# EAGLE board l1b_mk2 (EAGLE 6.4)
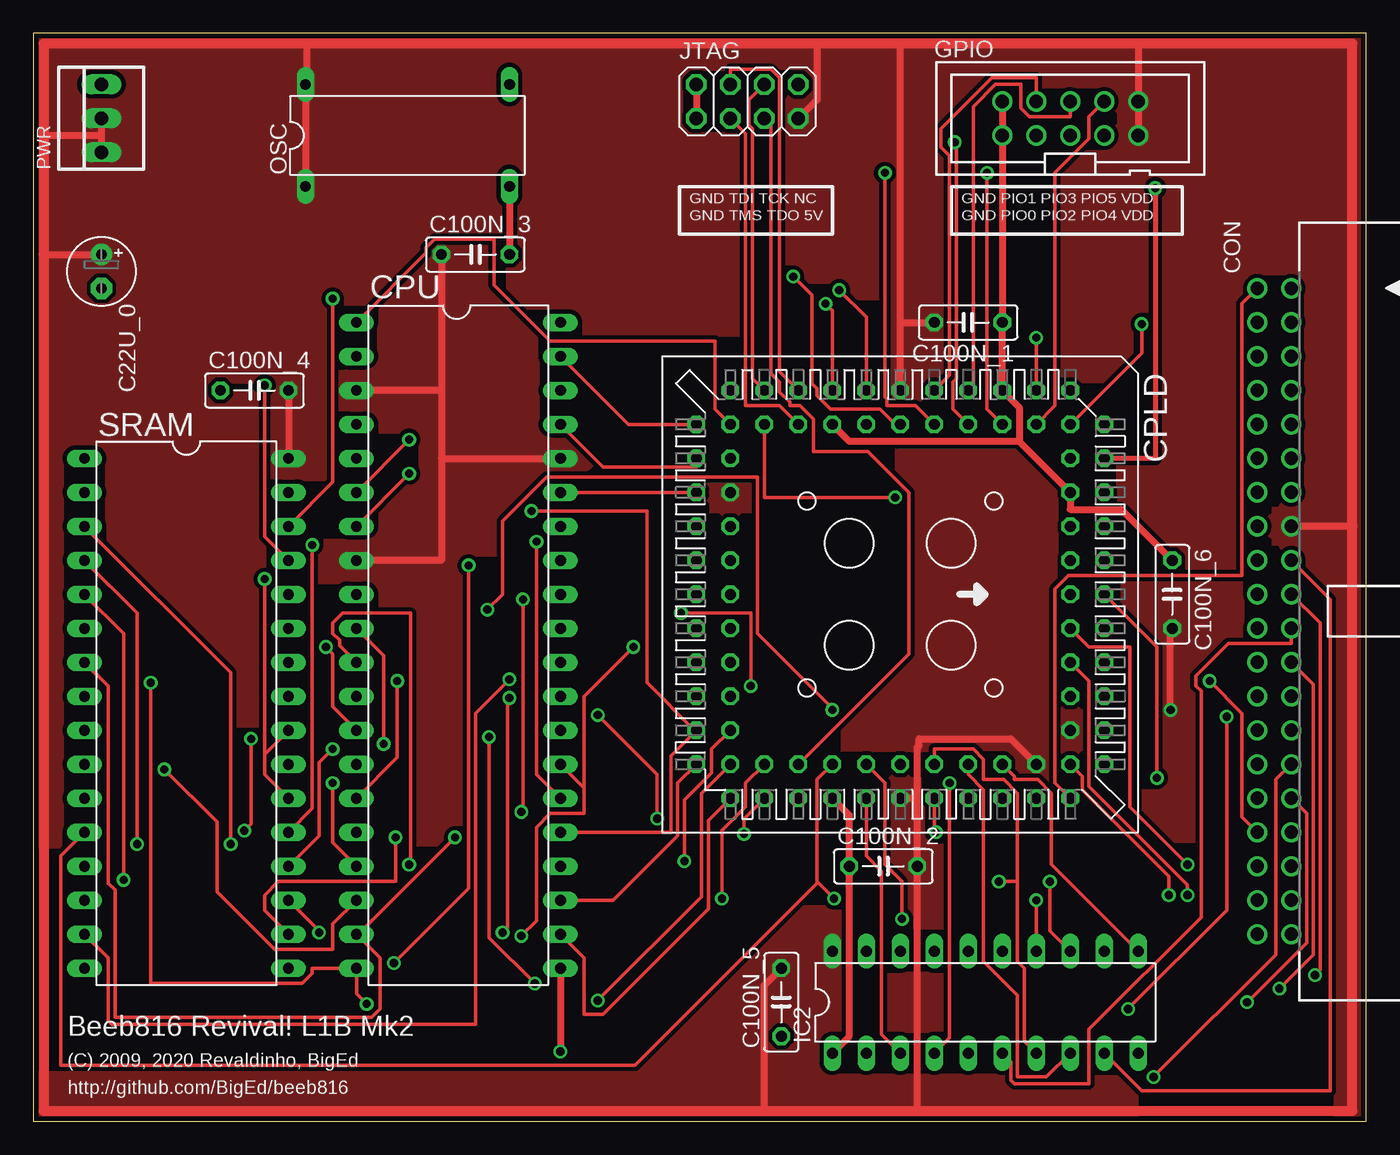
[diagram p0: board, top side]
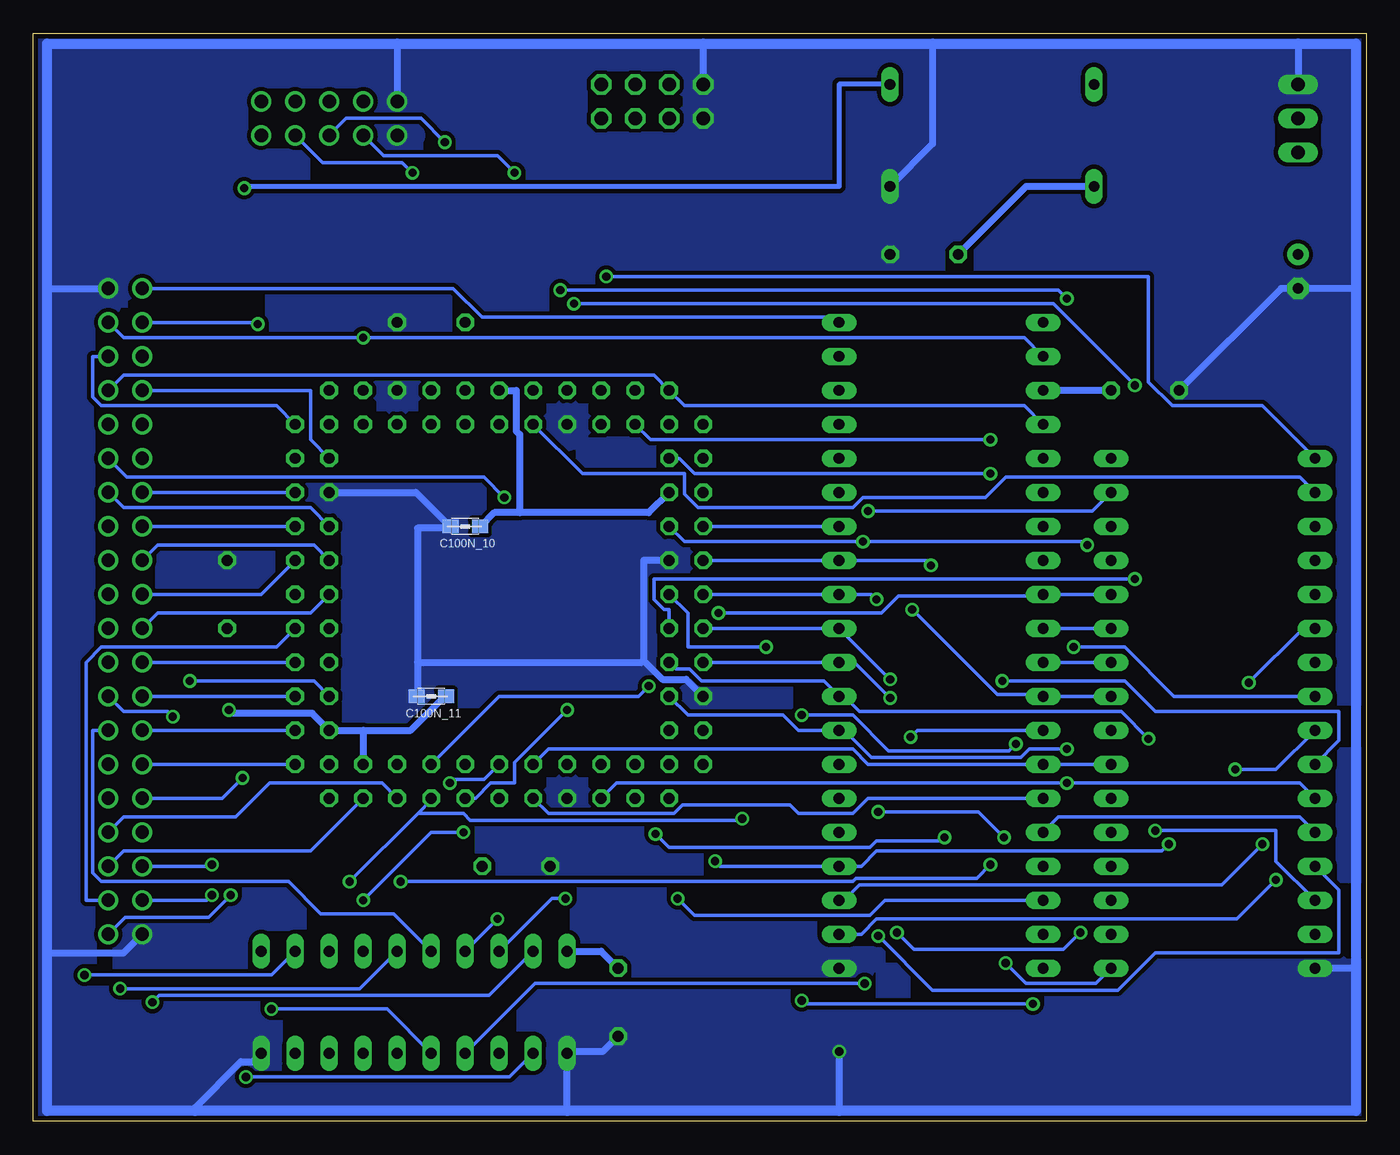
[diagram p1: board, bottom side, seen from below]

Size 99.57 x 81.28 mm. Coordinates in mm from the lower left corner, seen from the top.
Outline: 0,0 99.57,0 99.57,81.28 0,81.28 0,0
Copper layers (1*16): Top 0.035mm / dielectric 1.5mm / Bottom 0.035mm
Design rules "design_rules": minimum track width 10mil, minimum drill 24mil, track to track 10mil, track to pad 10mil, pad to pad 12mil, via to via 15mil, smd to smd 8mil, copper to edge 15mil, drill to drill 8mil, minimum pad ring 10mil, minimum via ring 8mil, stop-mask expansion 4mil, vias tented up to drill 0mil, thermal gap 10mil
Net classes: 0 signal: width 0.254 mm, clearance 0.254 mm; 1 supply: width 0.508 mm, clearance 0.305 mm

## Footprints (pad centres in the part's own frame; a part is rotated, then mirrored left to right if it is on the bottom)
E2,5-5 = drill 0.813 pad 1.6: + -1.27,0 | drill 0.813 pad 1.6 octagon: - 1.27,0
C050-025X075 = drill 0.813 octagon: 1 -2.54,0; 2 2.54,0
0805 = smd 1.2 x 1: 1 -1.1,0; 2 1.1,0
PAK100/2500-5-40 = drill 1 pad 1.422: 1 -24.13,-1.27; 2 -24.13,1.27; 3 -21.59,-1.27; 4 -21.59,1.27; 5 -19.05,-1.27; 6 -19.05,1.27; 7 -16.51,-1.27; 8 -16.51,1.27; 9 -13.97,-1.27; 10 -13.97,1.27; 11 -11.43,-1.27; 12 -11.43,1.27; 13 -8.89,-1.27; 14 -8.89,1.27; 15 -6.35,-1.27; 16 -6.35,1.27; 17 -3.81,-1.27; 18 -3.81,1.27; 19 -1.27,-1.27; 20 -1.27,1.27; 21 1.27,-1.27; 22 1.27,1.27; 23 3.81,-1.27; 24 3.81,1.27; 25 6.35,-1.27; 26 6.35,1.27; 27 8.89,-1.27; 28 8.89,1.27; 29 11.43,-1.27; 30 11.43,1.27; 31 13.97,-1.27; 32 13.97,1.27; 33 16.51,-1.27; 34 16.51,1.27; 35 19.05,-1.27; 36 19.05,1.27; 37 21.59,-1.27; 38 21.59,1.27; 39 24.13,-1.27; 40 24.13,1.27
PLCC-S84-SOCKET = drill 0.813 octagon: 1 0,15.24; 2 0,12.7; 3 -2.54,15.24; 4 -2.54,12.7; 5 -5.08,15.24; 6 -5.08,12.7; 7 -7.62,15.24; 8 -7.62,12.7; 9 -10.16,15.24; 10 -10.16,12.7; 11 -12.7,15.24; 12 -15.24,12.7; 13 -12.7,12.7; 14 -15.24,10.16; 15 -12.7,10.16; 16 -15.24,7.62; 17 -12.7,7.62; 18 -15.24,5.08; 19 -12.7,5.08; 20 -15.24,2.54; 21 -12.7,2.54; 22 -15.24,0; 23 -12.7,0; 24 -15.24,-2.54; 25 -12.7,-2.54; 26 -15.24,-5.08; 27 -12.7,-5.08; 28 -15.24,-7.62; 29 -12.7,-7.62; 30 -15.24,-10.16; 31 -12.7,-10.16; 32 -15.24,-12.7; 33 -12.7,-15.24; 34 -12.7,-12.7; 35 -10.16,-15.24; 36 -10.16,-12.7; 37 -7.62,-15.24; 38 -7.62,-12.7; 39 -5.08,-15.24; 40 -5.08,-12.7; 41 -2.54,-15.24; 42 -2.54,-12.7; 43 0,-15.24; 44 0,-12.7; 45 2.54,-15.24; 46 2.54,-12.7; 47 5.08,-15.24; 48 5.08,-12.7; 49 7.62,-15.24; 50 7.62,-12.7; 51 10.16,-15.24; 52 10.16,-12.7; 53 12.7,-15.24; 54 15.24,-12.7; 55 12.7,-12.7; 56 15.24,-10.16; 57 12.7,-10.16; 58 15.24,-7.62; 59 12.7,-7.62; 60 15.24,-5.08; 61 12.7,-5.08; 62 15.24,-2.54; 63 12.7,-2.54; 64 15.24,0; 65 12.7,0; 66 15.24,2.54; 67 12.7,2.54; 68 15.24,5.08; 69 12.7,5.08; 70 15.24,7.62; 71 12.7,7.62; 72 15.24,10.16; 73 12.7,10.16; 74 15.24,12.7; 75 12.7,15.24; 76 12.7,12.7; 77 10.16,15.24; 78 10.16,12.7; 79 7.62,15.24; 80 7.62,12.7; 81 5.08,15.24; 82 5.08,12.7; 83 2.54,15.24; 84 2.54,12.7
DIL40 = drill 0.813 long: 1 -24.13,-7.62; 2 -21.59,-7.62; 3 -19.05,-7.62; 4 -16.51,-7.62; 5 -13.97,-7.62; 6 -11.43,-7.62; 7 -8.89,-7.62; 8 -6.35,-7.62; 9 -3.81,-7.62; 10 -1.27,-7.62; 11 1.27,-7.62; 12 3.81,-7.62; 13 6.35,-7.62; 14 8.89,-7.62; 15 11.43,-7.62; 16 13.97,-7.62; 17 16.51,-7.62; 18 19.05,-7.62; 19 21.59,-7.62; 20 24.13,-7.62; 21 24.13,7.62; 22 21.59,7.62; 23 19.05,7.62; 24 16.51,7.62; 25 13.97,7.62; 26 11.43,7.62; 27 8.89,7.62; 28 6.35,7.62; 29 3.81,7.62; 30 1.27,7.62; 31 -1.27,7.62; 32 -3.81,7.62; 33 -6.35,7.62; 34 -8.89,7.62; 35 -11.43,7.62; 36 -13.97,7.62; 37 -16.51,7.62; 38 -19.05,7.62; 39 -21.59,7.62; 40 -24.13,7.62
PAK100/2500-10 = drill 1 pad 1.422: 1 -5.08,-1.27; 2 -5.08,1.27; 3 -2.54,-1.27; 4 -2.54,1.27; 5 0,-1.27; 6 0,1.27; 7 2.54,-1.27; 8 2.54,1.27; 9 5.08,-1.27; 10 5.08,1.27
DIL20 = drill 0.813 long: 1 -11.43,-3.81; 2 -8.89,-3.81; 3 -6.35,-3.81; 4 -3.81,-3.81; 5 -1.27,-3.81; 6 1.27,-3.81; 7 3.81,-3.81; 8 6.35,-3.81; 9 8.89,-3.81; 10 11.43,-3.81; 11 11.43,3.81; 12 8.89,3.81; 13 6.35,3.81; 14 3.81,3.81; 15 1.27,3.81; 16 -1.27,3.81; 17 -3.81,3.81; 18 -6.35,3.81; 19 -8.89,3.81; 20 -11.43,3.81
2X04 = drill 1.016 octagon: 1 -3.81,-1.27; 2 -3.81,1.27; 3 -1.27,-1.27; 4 -1.27,1.27; 5 1.27,-1.27; 6 1.27,1.27; 7 3.81,-1.27; 8 3.81,1.27
DIL14/4 = drill 0.813 long: 1 -7.62,-3.81; 7 7.62,-3.81; 8 7.62,3.81; 14 -7.62,3.81
22-23-2031 = drill 1 long: 1 -2.54,0; 2 0,0; 3 2.54,0
DIL32 = drill 0.813 long: 1 -19.05,-7.62; 2 -16.51,-7.62; 3 -13.97,-7.62; 4 -11.43,-7.62; 5 -8.89,-7.62; 6 -6.35,-7.62; 7 -3.81,-7.62; 8 -1.27,-7.62; 9 1.27,-7.62; 10 3.81,-7.62; 11 6.35,-7.62; 12 8.89,-7.62; 13 11.43,-7.62; 14 13.97,-7.62; 15 16.51,-7.62; 16 19.05,-7.62; 17 19.05,7.62; 18 16.51,7.62; 19 13.97,7.62; 20 11.43,7.62; 21 8.89,7.62; 22 6.35,7.62; 23 3.81,7.62; 24 1.27,7.62; 25 -1.27,7.62; 26 -3.81,7.62; 27 -6.35,7.62; 28 -8.89,7.62; 29 -11.43,7.62; 30 -13.97,7.62; 31 -16.51,7.62; 32 -19.05,7.62

## Placement (x,y rotation side)
C22U_0  [E2,5-5]  5.08,63.5 270 top
C100N_1  [C050-025X075]  69.85,59.69 180 top
C100N_2  [C050-025X075]  63.5,19.05 0 top
C100N_3  [C050-025X075]  33.02,64.77 0 top
C100N_4  [C050-025X075]  16.51,54.61 0 top
C100N_5  [C050-025X075]  55.88,8.89 90 top
C100N_6  [C050-025X075]  85.09,39.37 270 top
C100N_10  [0805]  67.31,44.45 0 bottom
C100N_11  [0805]  69.85,31.75 0 bottom
CON  [PAK100/2500-5-40]  92.71,38.1 270 top
CPLD  [PLCC-S84-SOCKET]  64.77,39.37 270 top
CPU  [DIL40]  31.75,35.56 270 top
GPIO  [PAK100/2500-10]  77.47,74.93 0 top
IC2  [DIL20]  71.12,8.89 0 top
JTAG  [2X04]  53.34,76.2 0 top
OSC  [DIL14/4]  27.94,73.66 0 top
PWR  [22-23-2031]  5.08,74.93 90 top
SRAM  [DIL32]  11.43,30.48 270 top

## Library data of the parts
C22U_0 C100N_1-C100N_6 = resistor
C100N_10 C100N_11 = wuerth-elektronik
CON GPIO = con-3m
CPLD CPU IC2 OSC SRAM = ic-package
JTAG = pinhead
PWR = con-molex

## Nets
BBC_A0: CON.18 IC2.9
BBC_A1: CON.20 IC2.12
BBC_A2: CON.22 IC2.6
BBC_A3: CON.24 IC2.15
BBC_A4: CON.26 IC2.5
BBC_A5: CON.28 IC2.16
BBC_A6: CON.30 IC2.2
BBC_A7: CON.32 IC2.19
BBC_A8: CON.34 CPLD.70
BBC_A9: CON.36 CPLD.72
BBC_A10: CON.38 CPLD.83
BBC_A11: CON.40 CPLD.76
BBC_A12: CON.37 CPLD.82
BBC_A13: CON.35 CPLD.84
BBC_A14: CON.33 CPLD.80
BBC_A15: CON.31 CPLD.1
BBC_D0: CON.15 CPLD.5
BBC_D1: CON.17 CPLD.4
BBC_D2: CON.19 CPLD.3
BBC_D3: CON.21 CPLD.2
BBC_D4: CON.23 CPLD.81
BBC_D5: CON.25 CPLD.79
BBC_D6: CON.27 CPLD.77
BBC_D7: CON.29 CPLD.75
BBC_PHI0: CON.7 CPLD.10
BBC_PHI1: CON.6 CPLD.11
BBC_PHI2: CON.3 CPLD.13
BBC_RNW: CON.13 CPLD.7
BBC_SYNC: CON.14 CPLD.6
CPU_A0: CPLD.69 CPU.9 IC2.8 SRAM.28
CPU_A1: CPLD.68 CPU.10 IC2.13 SRAM.27
CPU_A2: CPLD.67 CPU.11 IC2.7 SRAM.26
CPU_A3: CPLD.66 CPU.12 IC2.14 SRAM.25
CPU_A4: CPLD.65 CPU.13 IC2.4 SRAM.8
CPU_A5: CPLD.63 CPU.14 IC2.17 SRAM.23
CPU_A6: CPLD.62 CPU.15 IC2.3 SRAM.10
CPU_A7: CPLD.61 CPU.16 IC2.18 SRAM.12
CPU_A8: CPLD.58 CPU.17 SRAM.11
CPU_A9: CPLD.57 CPU.18 SRAM.9
CPU_A10: CPLD.56 CPU.19 SRAM.7
CPU_A11: CPLD.55 CPU.20 SRAM.6
CPU_A12: CPLD.54 CPU.22 SRAM.5
CPU_A13: CPLD.53 CPU.23 SRAM.4
CPU_A14: CPLD.52 CPU.24 SRAM.3
CPU_A15: CPLD.51 CPU.25 SRAM.31
CPU_D0: CPLD.41 CPU.33 SRAM.17
CPU_D1: CPLD.43 CPU.32 SRAM.18
CPU_D2: CPLD.45 CPU.31 SRAM.15
CPU_D3: CPLD.47 CPU.30 SRAM.19
CPU_D4: CPLD.48 CPU.29 SRAM.14
CPU_D5: CPLD.50 CPU.28 SRAM.20
CPU_D6: CPLD.44 CPU.27 SRAM.13
CPU_D7: CPLD.40 CPU.26 SRAM.21
CPU_E: CPLD.37 CPU.35
CPU_PHI2: CPLD.35 CPU.37
CPU_RNW: CPLD.39 CPU.34
CPU_VDA: CPLD.33 CPU.39
CPU_VPA: CPLD.36 CPU.7
CPU_VPB: CPLD.34 CPU.1
GPIO0: CPLD.21 GPIO.3
GPIO1: CPLD.20 GPIO.4
GPIO2: CPLD.19 GPIO.5
GPIO3: CPLD.18 GPIO.6
GPIO4: CPLD.17 GPIO.7
GPIO5: CPLD.15 GPIO.8
HSCLK: CPLD.9 OSC.8
IRQB: CON.8 CPLD.32 CPU.4
LAT_EN: CPLD.71 IC2.11
NMIB: CON.12 CPLD.31 CPU.6
RAM_A16: CPLD.25 SRAM.2
RAM_A17: CPLD.24 SRAM.30
RAM_A18: CPLD.23 SRAM.1
RAM_CEB: CPLD.46 SRAM.22 SRAM.24
RAM_WEB: CPLD.26 SRAM.29
RDY: CON.4 CPLD.14 CPU.2
RESETB: CON.1 CPLD.74 CPU.40
TCK: CPLD.30 JTAG.6
TDI: CPLD.28 JTAG.4
TDO: CPLD.59 JTAG.5
TMS: CPLD.29 JTAG.3
VDD [supply]: C22U_0.+ C100N_1.2 C100N_2.2 C100N_3.1 C100N_4.2 C100N_5.2 C100N_6.2 C100N_10.2 C100N_11.2 CON.16 CPLD.22 CPLD.38 CPLD.64 CPLD.73 CPLD.78 CPU.3 CPU.8 CPU.36 GPIO.9 GPIO.10 IC2.20 JTAG.7 OSC.1 OSC.14 PWR.1 PWR.2 SRAM.32
VSS [supply]: C22U_0.- C100N_1.1 C100N_2.1 C100N_3.2 C100N_4.1 C100N_5.1 C100N_6.1 C100N_10.1 C100N_11.1 CON.2 CON.39 CPLD.8 CPLD.16 CPLD.27 CPLD.42 CPLD.49 CPLD.60 CPU.21 GPIO.1 GPIO.2 IC2.1 IC2.10 JTAG.1 JTAG.2 OSC.7 PWR.3 SRAM.16

## Tracks (layer width: path | path; a pad name or v marks a point on that pad's centre or on a via)
BBC_A0
  Top 0.254: IC2.9 82.8,2.29 96.9,2.29 96.9,38.99 CON.18
BBC_A1  (via drill 0.61)
  Top 0.254: v95.76,10.92 96.14,11.3 96.14,37.21 CON.20
  Bottom 0.254: IC2.12 81.79,10.92 v95.76,10.92
BBC_A2
  Top 0.254: IC2.6 73.03,4.45 73.03,3.05 73.28,2.79 78.87,2.79 78.87,6.86 87.25,15.24 87.25,32.13 86.87,32.51 86.87,33.27 89.28,35.69 93.98,35.69 CON.22
BBC_A3  (via drill 0.61)
  Top 0.254: v93.09,9.91 95.63,12.45 95.63,32.64 CON.24
  Bottom 0.254: IC2.15 75.18,9.91 v93.09,9.91
BBC_A4  (via drill 0.61)
  Top 0.254: v81.79,8.38 89.15,15.75 v89.15,30.23
  Bottom 0.254: IC2.5 73.15,8.38 v81.79,8.38 | v89.15,30.23 89.53,30.61 92.84,30.61 CON.26
BBC_A5
  Bottom 0.254: IC2.16 72.64,15.49 78.11,15.49 80.52,17.91 94.49,17.91 95.12,18.54 95.12,29.21 CON.28
BBC_A6  (via drill 0.61)
  Top 0.254: v83.69,3.3 92.84,12.45 92.84,25.53 CON.30
  Bottom 0.254: IC2.2 64.01,3.3 v83.69,3.3
BBC_A7  (via drill 0.61)
  Top 0.254: v90.68,8.89 95.12,13.34 95.12,22.99 CON.32
  Bottom 0.254: IC2.19 65.53,9.4 90.17,9.4 v90.68,8.89
BBC_A8
  Bottom 0.254: CPLD.70 73.53,25.27 81.92,25.27 84.45,22.73 92.84,22.73 CON.34
BBC_A9
  Bottom 0.254: CPLD.72 78.87,20.19 92.84,20.19 CON.36
BBC_A10
  Bottom 0.254: CPLD.83 81.41,35.43 94.49,35.43 95.63,34.29 95.63,16.51 CON.38
BBC_A11  (via drill 0.61)
  Top 0.254: CPLD.76 78.36,25.78 78.36,24.77 84.84,18.29 v84.84,16.89
  Bottom 0.254: v84.84,16.89 86.49,15.24 92.71,15.24 CON.40
BBC_A12  (via drill 0.61)
  Top 0.254: CPLD.82 78.87,32.89 78.87,25.02 86.23,17.65 v86.23,16.89
  Bottom 0.254: v86.23,16.89 86.61,16.51 CON.37
BBC_A13  (via drill 0.61)
  Top 0.254: CPLD.84 78.87,35.43 81.92,35.43 81.92,23.5 v86.23,19.18
  Bottom 0.254: v86.23,19.18 86.36,19.05 CON.35
BBC_A14  (via drill 0.61)
  Top 0.254: v87.88,32.89 90.3,30.48 90.3,22.73 CON.33
  Bottom 0.254: CPLD.80 78.61,32.89 v87.88,32.89
BBC_A15  (via drill 0.61)
  Top 0.254: CPLD.1 83.95,35.43 v83.95,25.65
  Bottom 0.254: v83.95,25.65 85.47,24.13 CON.31
BBC_D0
  Bottom 0.254: CON.15 CPLD.5
BBC_D1
  Bottom 0.254: CPLD.4 78.61,43.05 90.3,43.05 CON.17
BBC_D2
  Bottom 0.254: CPLD.3 82.55,39.37 CON.19
BBC_D3
  Bottom 0.254: CPLD.2 78.87,37.97 90.3,37.97 CON.21
BBC_D4
  Bottom 0.254: CON.23 CPLD.81
BBC_D5
  Bottom 0.254: CON.25 CPLD.79
BBC_D6
  Bottom 0.254: CON.27 CPLD.77
BBC_D7
  Bottom 0.254: CON.29 CPLD.75
BBC_PHI0
  Bottom 0.254: CPLD.10 78.87,50.93 78.87,54.61 CON.7
BBC_PHI1
  Bottom 0.254: CPLD.11 81.41,53.47 94.49,53.47 95.12,54.1 95.12,57.15 CON.6
BBC_PHI2  (via drill 0.61)
  Top 0.254: CPLD.13 82.8,57.4 v82.8,59.56
  Bottom 0.254: v82.8,59.56 82.93,59.69 CON.3
BBC_RNW
  Bottom 0.254: CON.13 CPLD.7
BBC_SYNC
  Bottom 0.254: CPLD.6 78.87,45.85 92.84,45.85 CON.14
CPU_A0  (via drill 0.61)
  Top 0.254: IC2.8 75.69,3.3 73.53,3.3 73.53,9.4 70.99,11.94 70.99,24.77 69.85,25.91 CPLD.69 | v48.39,37.97 53.59,37.97 v53.59,32.51
  Bottom 0.254: SRAM.28 CPU.9 24.26,39.24 34.92,39.24 36.2,37.97 v48.39,37.97 | v53.59,32.51 54.36,31.75 64.77,31.75 CPLD.69
CPU_A1  (via drill 0.61)
  Top 0.254: IC2.13 75.95,14.22 v75.95,17.91 | CPU.10 26.16,34.8 v26.16,28.19 | v42.16,30.35 46.61,25.91 v46.61,22.61
  Bottom 0.254: CPU.10 SRAM.27 | 70.8,23.05 69.85,24 CPLD.68 | 70.8,23.05 v75.95,17.91 | v26.16,28.19 26.67,27.69 35.69,27.69 38.35,30.35 v42.16,30.35 | v46.61,22.61 46.74,22.48 66.93,22.48 67.44,22.99 70.74,22.99 70.8,23.05
CPU_A2  (via drill 0.61)
  Top 0.254: IC2.7 74.04,5.97 74.04,11.43 73.53,11.94 73.53,17.91 | 73.53,17.91 73.53,24.51 72.52,25.53 70.99,25.53 70.99,27.05 70.23,27.81 67.31,27.81 CPLD.67 | CPU.11 22.86,35.56 22.86,35.94 22.35,36.45 22.35,37.21 23.11,37.97 28.19,37.97 28.19,19.3 v28.07,19.18 | 73.53,17.91 v72.14,17.91
  Bottom 0.254: CPU.11 SRAM.26 | v28.07,19.18 29.08,18.16 38.1,18.16 38.35,17.91 v72.14,17.91
CPU_A3  (via drill 0.61)
  Top 0.254: v74.93,16.51 IC2.14 | v67.44,21.59 67.31,21.72 CPLD.66 | v33.91,38.23 35.05,39.37 35.05,44.83 38.35,48.13 54.1,48.13 54.1,36.45 59.69,30.86 v59.69,30.73
  Bottom 0.254: SRAM.25 CPU.12 24.26,31.88 27.56,31.88 v33.91,38.23 | v74.93,16.51 69.85,21.59 v67.44,21.59 | v59.69,30.73 63.63,26.8 63.63,25.27 65.41,25.27 66.55,24.13 CPLD.66
CPU_A4  (via drill 0.61)
  Top 0.254: IC2.4 68.45,6.22 v68.45,25.27 | v21.84,35.43 22.35,34.92 22.35,30.99 CPU.13 | v37.47,10.29 34.04,13.72 v34.04,28.7
  Bottom 0.254: v68.45,25.27 68.2,25.53 65.91,25.53 CPLD.65 | SRAM.8 14.35,31.75 18.03,35.43 v21.84,35.43 | IC2.4 62.1,10.29 v37.47,10.29 | v34.04,28.7 33.53,29.21 CPU.13
CPU_A5  (via drill 0.61)
  Top 0.254: CPLD.63 63.63,25.27 63.63,19.18 64.9,17.91 v64.9,15.11
  Bottom 0.254: SRAM.23 CPU.14 37.21,26.67 38.35,27.81 61.09,27.81 CPLD.63 | IC2.17 v64.9,15.11
CPU_A6  (via drill 0.61)
  Top 0.254: v27.18,32.89 27.18,27.18 CPU.15 | IC2.3 63.37,6.48 63.37,18.67 62.23,19.81 CPLD.62
  Bottom 0.254: CPU.15 37.21,24.13 38.35,22.99 42.42,22.99 43.05,23.62 51.05,23.62 51.69,22.99 61.09,22.99 CPLD.62 | SRAM.10 2.03,28.45 2.03,30.61 15.75,30.61 18.03,32.89 v27.18,32.89
CPU_A7  (via drill 0.61)
  Top 0.254: 58.61,17.84 58.55,17.91 58.55,25.53 CPLD.61 | 58.61,17.84 v59.82,16.64 | 58.61,17.84 44.96,4.19 2.03,4.19 2.03,19.81 SRAM.12
  Bottom 0.254: IC2.18 60.83,16.64 v59.82,16.64 | SRAM.12 4.95,22.73 22.99,22.73 CPU.16
CPU_A8  (via drill 0.61)
  Top 0.254: CPU.17 22.35,20.83 v22.35,25.27
  Bottom 0.254: SRAM.11 4.95,25.27 v22.35,25.27 56.01,25.27 CPLD.58
CPU_A9  (via drill 0.61)
  Top 0.254: v9.78,26.29 13.72,22.35 13.72,17.14 18.03,12.83 22.35,12.83 22.35,14.73 CPU.18 | CPLD.57 53.21,25.27 53.21,23.5 51.44,21.72 v51.44,16.64
  Bottom 0.254: SRAM.9 6.73,26.29 v9.78,26.29 | v51.44,16.64 50.16,15.37 37.08,15.37 35.94,16.51 CPU.18
CPU_A10  (via drill 0.61)
  Top 0.254: SRAM.7 5.59,32.51 5.59,17.78 6.1,17.27 6.1,7.75 25.27,7.75 25.91,8.38 25.91,12.19 CPU.19 24.26,13.97 v31.5,21.21 | CPLD.56 53.09,22.61 v53.09,21.46
  Bottom 0.254: v53.09,21.46 52.07,20.45 37.08,20.45 36.58,20.95 31.75,20.95 v31.5,21.21
CPU_A11  (via drill 0.61)
  Top 0.254: v8.76,32.77 8.76,10.29 20.07,10.29 20.83,11.05 20.83,11.43 CPU.20 24.13,9.53 v24.89,8.76 | CPLD.55 49.91,24.51 49.91,16.76 v42.16,9.02
  Bottom 0.254: v8.76,32.77 4.7,36.83 SRAM.6 | v42.16,9.02 41.91,8.76 v24.89,8.76
CPU_A12  (via drill 0.61)
  Top 0.254: SRAM.5 6.73,36.45 v6.73,18.03 | CPLD.54 50.42,22.48 50.42,15.88 42.55,8 41.15,8 41.15,12.19 CPU.22
  Bottom 0.254: v6.73,18.03 9.65,15.11 36.58,15.11 37.72,13.97 CPU.22
CPU_A13  (via drill 0.61)
  Top 0.254: SRAM.4 7.75,37.97 v7.75,20.7 | CPLD.53 48.13,25.27 48.13,21.34 43.31,16.51 CPU.23
  Bottom 0.254: v7.75,20.7 10.79,17.65 37.85,17.65 38.99,16.51 CPU.23
CPU_A14  (via drill 0.61)
  Top 0.254: SRAM.3 14.73,33.53 v14.73,20.7 | CPLD.52 50.67,27.81 50.67,26.04 48.64,24 v48.64,19.43
  Bottom 0.254: v14.73,20.7 15.24,20.19 36.58,20.19 37.72,19.05 CPU.24 48.26,19.05 v48.64,19.43
CPU_A15  (via drill 0.61)
  Top 0.254: CPU.25 47.62,21.59 47.62,27.3 CPLD.51 49.4,29.21 45.85,32.77 45.85,45.59 v37.21,45.59
  Bottom 0.254: SRAM.31 20.45,45.59 v37.21,45.59
CPU_D0  (via drill 0.61)
  Top 0.254: v26.92,11.81 32.51,17.4 v32.51,41.53
  Bottom 0.254: SRAM.17 20.19,10.29 25.4,10.29 v26.92,11.81 | v32.51,41.53 32.89,41.91 CPU.33 CPLD.41
CPU_D1  (via drill 0.61)
  Top 0.254: SRAM.18 17.27,15.75 17.27,16.89 18.29,17.91 27.05,17.91 v27.05,21.21 | v36.45,23.11 36.58,23.24 v36.58,38.99
  Bottom 0.254: v27.05,21.21 28.96,23.11 v36.45,23.11 | v36.58,38.99 36.96,39.37 CPU.32 CPLD.43
CPU_D2  (via drill 0.61)
  Top 0.254: SRAM.15 5.59,12.19 5.59,7.49 5.84,7.24 33.02,7.24 33.02,30.48 v35.56,33.02
  Bottom 0.254: v35.56,33.02 CPU.31 CPLD.45
CPU_D3  (via drill 0.61)
  Top 0.254: SRAM.19 21.34,14.22 v21.34,14.1 | v35.05,14.1 35.43,14.48 35.43,31.5 v35.56,31.62
  Bottom 0.254: v21.34,14.1 22.61,12.83 33.78,12.83 v35.05,14.1 | v35.56,31.62 38.23,34.29 CPU.30 CPLD.47
CPU_D4  (via drill 0.61)
  Top 0.254: v15.75,21.72 16.26,22.23 v16.26,28.57
  Bottom 0.254: SRAM.14 6.73,19.43 6.73,21.72 v15.75,21.72 | v16.26,28.57 18.29,30.61 37.85,30.61 38.99,31.75 CPU.29 40.51,32.89 49.66,32.89 50.55,33.78 51.56,33.78 CPLD.48
CPU_D5  (via drill 0.61)
  Top 0.254: SRAM.20 21.34,21.34 21.34,26.8 v22.35,27.81
  Bottom 0.254: v22.35,27.81 25.15,27.81 25.78,27.18 36.96,27.18 38.99,29.21 CPU.28 42.42,29.21 43.56,30.35 50.67,30.35 CPLD.50
CPU_D6  (via drill 0.61)
  Top 0.254: v36.45,13.84 37.59,14.99 37.59,21.97 38.61,22.99 41.15,22.99 41.15,24.89 41.08,24.96 | CPU.27 41.08,24.96 | v44.83,35.43 41.15,31.75 41.15,25.02 41.08,24.96
  Bottom 0.254: SRAM.13 2.03,17.27 2.03,12.57 15.75,12.57 18.54,9.78 32.38,9.78 v36.45,13.84 | CPLD.44 50.67,37.97 50.67,35.43 v44.83,35.43
CPU_D7  (via drill 0.61)
  Top 0.254: SRAM.21 20.83,23.37 v20.83,43.05 | CPU.26 37.59,25.91 v37.59,43.31
  Bottom 0.254: v20.83,43.05 21.08,43.31 v37.59,43.31 50.93,43.31 CPLD.40
CPU_E
  Top 0.254: CPLD.37 CPU.35
CPU_PHI2
  Top 0.254: CPU.37 42.55,48.9 49.53,48.9 CPLD.35
CPU_RNW
  Bottom 0.254: CPLD.39 CPU.34
CPU_VDA
  Top 0.254: CPU.39 44.45,52.07 CPLD.33
CPU_VPA  (via drill 0.61)
  Top 0.254: v28.07,48.39 CPU.7
  Bottom 0.254: v28.07,48.39 50.16,48.39 51.31,49.53 CPLD.36
CPU_VPB
  Top 0.254: CPU.1 29.34,64.9 29.34,65.28 29.97,65.91 34.42,65.91 34.42,62.48 38.61,58.29 50.93,58.29 50.93,53.21 CPLD.34
GPIO0  (via drill 0.61)
  Top 0.254: CPLD.21 65.91,53.47 63.75,53.47 63.75,53.98 63.63,54.1 v63.63,70.87
  Bottom 0.254: v63.63,70.87 64.9,72.14 73.41,72.14 GPIO.3
GPIO1
  Top 0.254: CPLD.20 68.45,55.75 68.45,72.14 67.82,72.77 67.82,74.17 71.63,77.98 74.93,77.98 GPIO.4
GPIO2  (via drill 0.61)
  Top 0.254: CPLD.19 68.71,53.21 68.71,55.24 68.96,55.5 68.96,73.03 v68.83,73.15
  Bottom 0.254: v68.83,73.15 70.61,74.93 76.2,74.93 GPIO.5
GPIO3
  Top 0.254: CPLD.18 70.23,54.99 70.23,75.82 71.88,77.47 73.79,77.47 73.79,75.69 74.42,75.06 77.47,75.06 GPIO.6
GPIO4  (via drill 0.61)
  Top 0.254: CPLD.17 71.25,53.21 v71.25,70.87
  Bottom 0.254: v71.25,70.87 72.01,71.63 77.98,71.63 GPIO.7
GPIO5
  Top 0.254: CPLD.15 76.33,53.47 76.33,70.87 78.87,73.41 78.87,75.06 GPIO.8
HSCLK  (via drill 0.61)
  Top 0.381: 83.82,69.85 v83.82,69.72 83.82,49.53 CPLD.9
  Bottom 0.254: v83.82,69.72 83.82,69.85
  Bottom 0.381: OSC.8 39.37,77.47 39.37,69.85 83.82,69.85
IRQB
  Bottom 0.254: CPU.4 25.53,53.47 50.93,53.47 CPLD.32 53.21,55.75 92.84,55.75 CON.8
LAT_EN
  Top 0.254: IC2.11 76.07,19.18 76.07,24.51 75.06,25.53 73.28,25.53 73.28,25.78 CPLD.71
NMIB  (via drill 0.61)
  Top 0.254: v28.07,50.93 CPU.6 | v64.39,46.61 54.61,46.61 CPLD.31
  Bottom 0.254: v28.07,50.93 53.47,50.93 CPLD.31 | CON.12 92.58,48.13 65.91,48.13 v64.39,46.61
RAM_A16
  Bottom 0.254: SRAM.2 4.95,48.13 26.92,48.13 28.45,46.61 37.59,46.61 38.35,45.85 49.91,45.85 50.93,46.86 50.93,48.39 58.55,48.39 CPLD.25
RAM_A17  (via drill 0.61)
  Top 0.254: SRAM.30 22.35,47.75 v22.35,61.47 | v60.2,62.1 62.23,60.07 CPLD.24
  Bottom 0.254: v22.35,61.47 22.99,62.1 v60.2,62.1
RAM_A18  (via drill 0.61)
  Top 0.254: v56.77,63.12 58.17,61.72 58.17,55.12 58.55,54.74 58.55,54.23 59.56,53.21 63.25,53.21 64.39,52.07 CPLD.23
  Bottom 0.254: SRAM.1 7.75,53.47 14.48,53.47 16.26,55.24 16.26,63.12 v56.77,63.12
RAM_CEB  (via drill 0.61)
  Top 0.254: SRAM.22 17.27,25.91 17.27,27.43 17.34,27.5 | SRAM.24 17.34,27.5 | v17.27,40.51 17.27,27.56 17.34,27.5
  Bottom 0.254: CPLD.46 52.07,38.23 52.45,38.23 53.21,38.99 53.21,40.51 v17.27,40.51
RAM_WEB  (via drill 0.61)
  Top 0.254: SRAM.29 17.27,43.69 v17.27,54.99 | v59.18,61.09 59.69,60.58 CPLD.26
  Bottom 0.254: v17.27,54.99 23.37,61.09 v59.18,61.09
RDY  (via drill 0.61)
  Top 0.254: v74.93,58.55 CPLD.14
  Bottom 0.254: CPU.2 25.53,58.55 v74.93,58.55 92.84,58.55 CON.4
RESETB
  Top 0.254: CPLD.74 76.33,25.27 76.33,39.75 77.34,40.77 90.3,40.77 90.3,61.09 CON.1
  Bottom 0.254: CPU.40 39.75,60.07 66.04,60.07 68.2,62.23 CON.1
TCK
  Top 0.254: CPLD.30 53.72,55.5 53.72,74.17 53.47,74.42 53.47,76.33 JTAG.6
TDI
  Top 0.254: CPLD.28 55.75,56.01 55.75,77.98 55.12,78.61 52.07,78.61 JTAG.4
TDO
  Top 0.254: CPLD.59 65.41,34.92 65.41,46.99 62.36,50.04 58.29,50.04 58.29,52.45 57.28,53.47 56.52,53.47 56.52,53.72 55.75,54.48 55.75,55.24 55.12,55.88 55.12,74.42 JTAG.5
TMS
  Top 0.254: CPLD.29 55.75,53.47 53.21,53.47 53.21,73.79 JTAG.3
VDD  (via drill 0.61)
  Top 0.508: C100N_3.1 30.48,54.61 | 30.48,54.61 30.48,49.53 | 30.48,49.53 30.48,41.91 CPU.8 | 66.04,0.76 C100N_2.2 66.04,24.13 | 66.04,24.13 66.04,27.94 66.17,28.07 66.17,28.57 73.03,28.57 CPLD.73 | CPLD.22 64.77,59.69 | 64.77,59.69 64.77,80.52 | 64.77,59.69 C100N_1.2 | C100N_4.2 SRAM.32 | 30.48,49.53 CPU.36 | 30.48,54.61 CPU.3 | C100N_6.2 84.96,36.7 v84.96,30.73 | GPIO.9 GPIO.10 82.55,80.52 | PWR.2 5.08,73.66 | 5.08,73.66 PWR.1 | 66.04,24.13 CPLD.64 | OSC.1 OSC.14 20.45,77.6 20.45,80.52 | 98.55,44.45 CON.16 | JTAG.7 58.55,76.33 58.55,80.52 | 0.76,64.77 C22U_0.+ | 0.76,73.66 5.08,73.66 | C100N_5.2 54.61,10.16 54.61,0.76
  Top 0.762: 0.76,0.76 54.61,0.76 66.04,0.76 98.55,0.76 98.55,44.45 98.55,80.52 82.55,80.52 64.77,80.52 58.55,80.52 20.45,80.52 0.76,80.52 0.76,73.66 0.76,64.77 0.76,0.76
  Bottom 0.508: C100N_4.2 CPU.3 | 74.93,29.21 CPLD.78 78.74,30.48 84.71,30.48 v84.96,30.73 | 74.93,29.21 71.37,29.21 68.83,31.75 C100N_11.2 | 74.93,29.21 CPLD.73 | 63.25,45.47 53.59,45.47 CPLD.38 | 63.25,45.47 65.15,45.47 66.17,44.45 C100N_10.2 | C100N_5.2 57.15,12.7 IC2.20 | 63.25,45.47 63.25,51.31 63.5,51.56 63.5,54.61 CPLD.22 | C100N_3.1 25.4,69.85 OSC.1
  pour Top: 0,0 0,81.28 99.57,81.28 99.57,0
VSS  (via drill 0.61)
  Top 0.508: CPU.21 v39.37,5.21 39.37,5.08 | CPLD.27 60.96,50.8 73.66,50.8 | 73.66,50.8 73.66,53.34 CPLD.16 C100N_1.1 GPIO.1 GPIO.2 | C100N_6.1 81.28,45.72 77.47,45.72 CPLD.8 73.66,50.8 | CPLD.60 60.96,22.86 C100N_2.1 60.96,6.35 IC2.1 | OSC.7 C100N_3.2 | JTAG.2 JTAG.1
  Bottom 0.508: v39.37,5.21 39.37,0.76 | CPLD.49 50.8,33.02 52.58,33.02 53.98,34.42 | 53.98,34.42 53.98,41.91 CPLD.42 | CPLD.8 70.99,46.99 68.45,44.45 C100N_10.1 68.58,44.32 70.87,44.32 70.87,34.29 | 70.87,34.29 70.87,31.75 C100N_11.1 | 70.87,34.29 54.1,34.29 53.98,34.42 | C100N_4.1 6.35,62.23 C22U_0.- 0.76,62.23 | 59.69,0.76 IC2.1 59.56,5.21 57.02,5.21 C100N_5.1 | IC2.10 83.19,4.45 84.07,4.45 87.5,1.02 87.5,0.76 | 0.76,11.43 SRAM.16 | 5.08,80.52 PWR.3 | CON.39 92.84,12.57 98.55,12.57 | 98.55,62.23 CON.2 | 72.39,80.52 GPIO.2 | 49.53,80.52 JTAG.2 | OSC.7 32.38,73.03 32.38,80.52
  Bottom 0.762: 0.76,0.76 39.37,0.76 59.69,0.76 87.5,0.76 98.55,0.76 98.55,12.57 98.55,62.23 98.55,80.52 72.39,80.52 49.53,80.52 32.38,80.52 5.08,80.52 0.76,80.52 0.76,62.23 0.76,11.43 0.76,0.76
  pour Bottom: 0,0 0,81.28 99.57,81.28 99.57,0

## Text on the board
tPlace: GND TDI TCK NC | GND PIO1 PIO3 PIO5 VDD | GND TMS TDO 5V | GND PIO0 PIO2 PIO4 VDD | Beeb816 Revival! L1B Mk2 | (C) 2009, 2020 Revaldinho, BigEd | http://github.com/BigEd/beeb816